# Altium PCB HATB-A0.PcbDoc
Units mm, origin at the board's own origin, x right, y up, seen from the top; angles counter-clockwise.
Board outline 83.5 x 75.5 mm, 2 copper layers (Top Layer, Bottom Layer); 66 components, 39 nets, 161 pads, 384 vias.
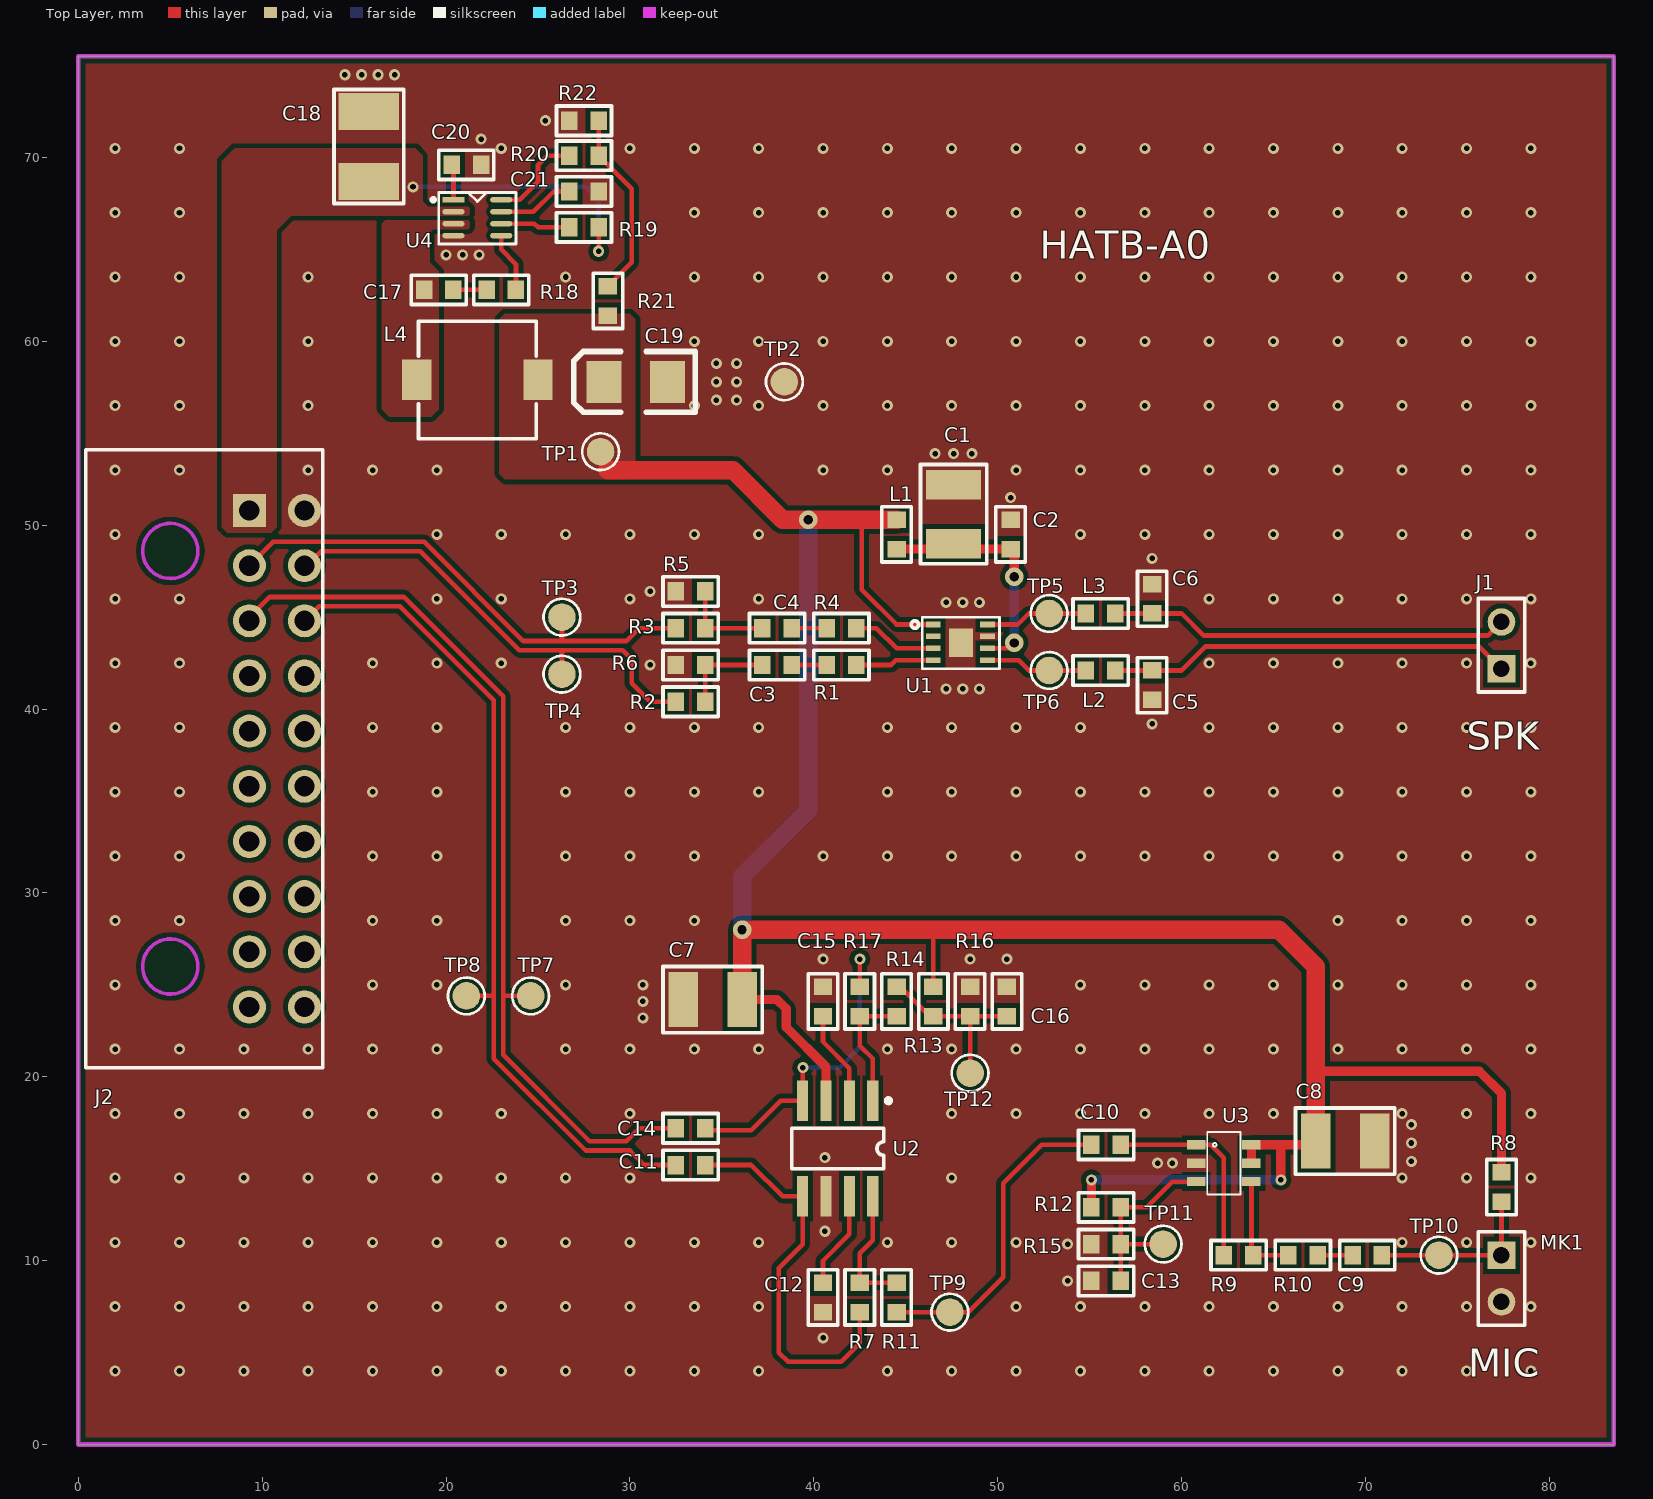
[diagram p0: Top Layer view]
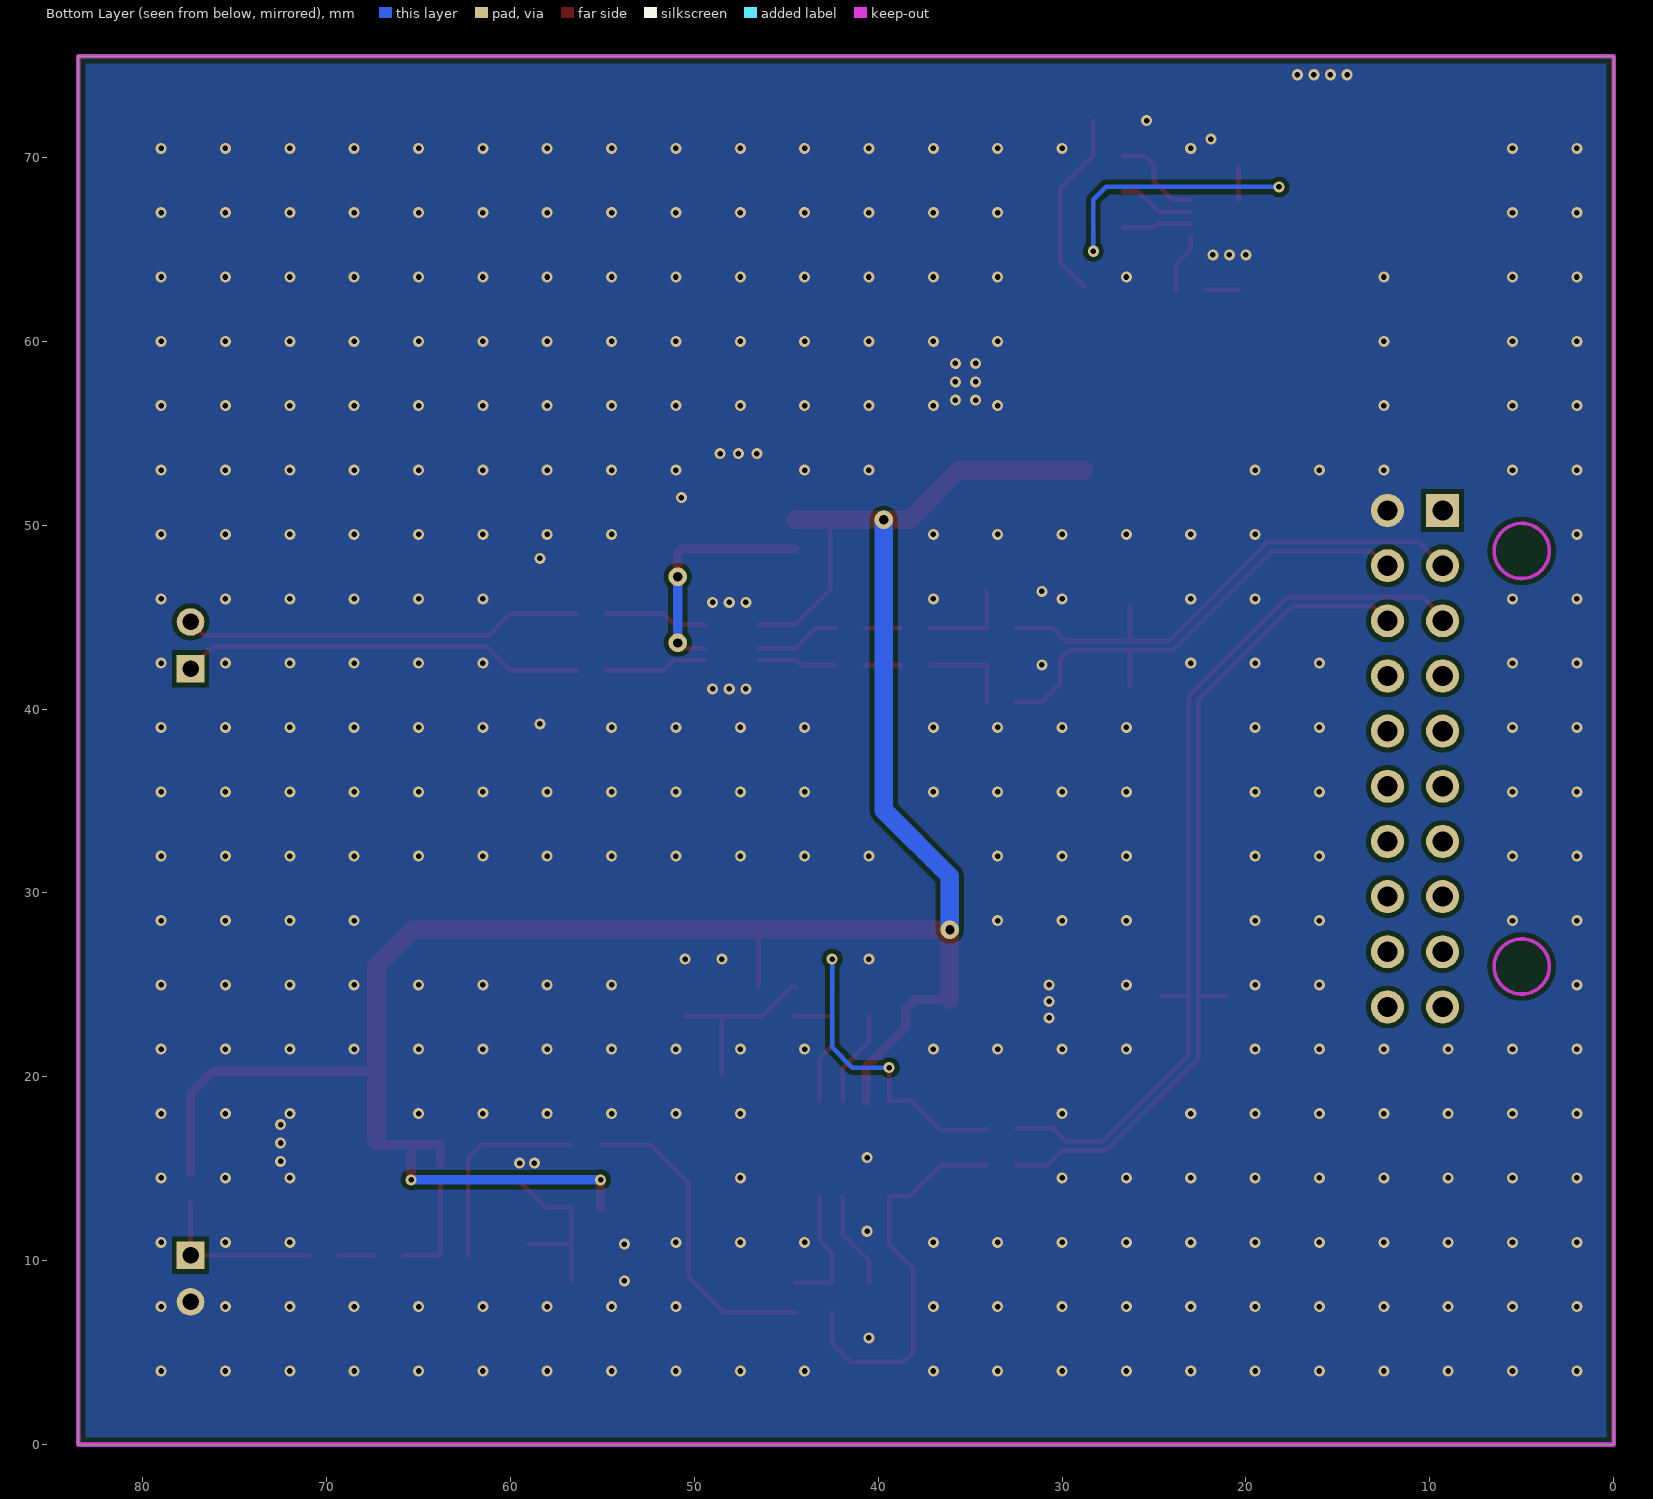
[diagram p1: Bottom Layer view, seen from below]

## Layer stack, top to bottom
Top Layer: signal copper 0.0356
Dielectric: dielectric 0.32, FR-4, Dk 4.8
Bottom Layer: signal copper 0.0356

## Board outline
0,0 83.5,0 83.5,75.5 0,75.5

## Design rules (kind name [scope] priority, off if disabled: settings)
Clearance Clearance_2 [InComponent('U4')] p1: gap=0.2
Clearance Clearance_1 [InNet('V12') vs InNet('NetC17_1')] p2: gap=0.2
Clearance [All] p3: gap=0.254
ComponentClearance [All] p1: gap=0.1 collisioncheckmode=3 verticalgap=0.1 showdistances=FALSE
PolygonConnect [All] p1: connectstyle=Direct reliefconductorwidth=0.254 reliefentries=4 polygonreliefangle="90 Angle"
RoutingVias [All] p1: holewidth=0.3 width=0.6 viastyle="Through Hole" minholewidth=0.3 minwidth=0.6 maxholewidth=0.3 maxwidth=0.6
SilkscreenOverComponentPads [All] p1: minsilkscreentomaskgap=0.254
SolderMaskExpansion [All] p1: expansion=0.102
Width [All] p1: maxlimit=4 minlimit=0.254 preferedwidth=0.254 minimp=50.000000 maximp=50.000000 favimp=50.000000
26 further rules are at their usual default settings.

## Classes and differential pairs
component class handset_adapter: C1 C2 C3 C4 C5 C6 C7 C8 C9 C10 C11 C12 C13 C14 C15 C16 C17 C18 C19 C20 C21 J1 J2 L1 L2 L3 L4 MK1 R1 R2 R3 R4 R5 R6 R7 R8 R9 R10 R11 R12 R13 R14 R15 R16 R17 R18 R19 R20 R21 R22 U1 U2 U3 U4

## Components (designator, comment, footprint, x,y, rotation, side; value= is the part's Value field where it differs from the comment)
C1 "22uF/10V" 1210 47.6,52.2 r270 top
C2 "0.1uF" 0603 50.7,49.5 r180 top
C3 "0.1uF" 0603 38,42.4 r90 top
C4 "0.1uF" 0603 38,44.4 r90 top
C5 "1000pF" 0603 58.4,41.3 r180 top
C6 "1000pF" 0603 58.4,46 r0 top
C7 "22uF/10V" 1210 32.9,24.2 r0 top
C8 "22uF/10V" 1210 70.5,16.5 r180 top
C9 "0.1uF" 0603 70.1,10.3 r270 top
C10 "0.1uF" 0603 55.9,16.3 r270 top
C11 "0.22uF" 0603 33.3,15.2 r90 top
C12 "0.1uF" 0603 40.5,8 r0 top
C13 "0.22uF" 0603 55.9,8.9 r90 top
C14 "0.22uF" 0603 33.3,17.2 r90 top
C15 "0.22uF" 0603 40.5,24.1 r180 top
C16 "0.22uF" 0603 50.5,24.1 r0 top
C17 "0.1uF" 0603 19.6,62.8 r90 top
C18 "10uF/25V" 1812 15.8,72.5 r270 top
C19 "47uF/10V(tan)" 3528 28.6,57.8 r180 top
C20 "0.022uF" 0603 21.1,69.6 r270 top
C21 "0.1uF" 0603 27.5,68.15 r270 top
J1 "SPEAKER" HDR1X2 77.4,42.2 r90 top
J2 "Header 20" COMM-3MM-2X10 12.3,50.8 r270 top
L1 "2200ohm/100MHz BEAD" 0603 44.5,49.5 r0 top
L2 "2200ohm/100MHz BEAD" 0603 55.6,42.1 r90 top
L3 "2200ohm/100MHz BEAD" 0603 55.6,45.2 r90 top
L4 "4.7uH/4A" IND-4.7UH-4A 21.7,57.9 r270 top
MK1 "MIC" HDR1X2 77.4,10.3 r270 top
R1 "150K" 0603 41.5,42.4 r90 top
R2 "510" 0603 33.3,40.4 r270 top
R3 "510" 0603 33.3,44.4 r270 top
R4 "150K" 0603 41.5,44.4 r90 top
R5 "510" 0603 33.3,46.4 r270 top
R6 "510" 0603 33.3,42.4 r270 top
R7 "5.1K" 0603 42.5,8 r0 top
R8 "15K" 0603 77.4,14 r180 top
R9 "100K" 0603 63.1,10.3 r90 top
R10 "10K" 0603 66.6,10.3 r90 top
R11 "1K" 0603 44.5,8 r180 top
R12 "20K" 0603 55.9,12.9 r90 top
R13 "10K" 0603 46.5,24.1 r0 top
R14 "1K" 0603 44.5,24.1 r0 top
R15 "20K" 0603 55.9,10.9 r270 top
R16 "10K" 0603 48.5,24.1 r0 top
R17 "5.1K" 0603 42.5,24.1 r180 top
R18 "10" 0603 23,62.8 r90 top
R19 "100K" 0603 27.5,66.2 r90 top
R20 "33K/1%" 0603 27.5,70.1 r270 top
R21 "40.2K/1%" 0603 28.8,62.2 r180 top
R22 "7.68K/1%" 0603 27.5,72 r270 top
TP1 "Comment" TP 28.4,54 r0 top
TP2 "Comment" TP 38.4,57.8 r0 top
TP3 "Comment" TP 26.3,45 r0 top
TP4 "Comment" TP 26.3,41.9 r0 top
TP5 "Comment" TP 52.8,45.2 r0 top
TP6 "Comment" TP 52.8,42.1 r0 top
TP7 "Comment" TP 24.6,24.4 r0 top
TP8 "Comment" TP 21.1,24.4 r0 top
TP9 "Comment" TP 47.4,7.2 r0 top
TP10 "Comment" TP 74,10.3 r0 top
TP11 "Comment" TP 59,10.9 r0 top
TP12 "Comment" TP 48.5,20.2 r0 top
U1 "TPA2005D1" QFN-8 46.5,44.6 r270 top
U2 "THS4521" SO8 41.3,16.1 r180 top
U3 "OPA836" SOT23-6 60.8,16.3 r270 top
U4 "MP1497DJ" TSOT23-8 20.4,67.7 r0 top

## Footprints (in the part's own frame and the unit in brackets; to place one, negate y for a bottom-side part, rotate by r counter-clockwise, add the part's x,y. Pads: shape width x height; smd on the part's side, far side on the other; paste and mask are expansions set on the pad)
0603 [mm]
  rect 1x0.9 smd: 1(0,0.8) 2(0,-0.8)
  silkscreen extent -0.8,-1.5 0.8,1.5
1210 [mm]
  rect 1.6x3 smd: 1(0,0) 2(3.2,0)
  silkscreen extent -1.1,-1.8 4.3,1.8
1812 [mm]
  rect 2x3.3 smd: 1(0,0) 2(3.8,0)
  silkscreen extent -1.2,-1.9 5,1.9
3528 [mil]
  rect 75x90 smd: 1(0,0) 2(-135,0)
  silkscreen extent -195,-65 65,65
COMM-3MM-2X10 [mm]
  rect 1.8x1.8 hole 1.1: 1(0,-3)
  round 1.8 hole 1.1: 2(0,0) 3(3,-3) 4(3,0) 5(6,-3) 6(6,0) 7(9,-3) 8(9,0) 9(12,-3) 10(12,0) 11(15,-3) 12(15,0) 13(18,-3) 14(18,0) 15(21,-3) 16(21,0) 17(24,-3) 18(24,0) 19(27,-3) 20(27,0)
  Keep-Out Layer circle w0.2: c2.2,-7.3 r1.5
  Keep-Out Layer circle w0.2: c24.8,-7.3 r1.5
  silkscreen extent -3.3,-11.9 30.3,1
HDR1X2 [mm] "Connector; Header; 2 Position"
  rect 1.5x1.5 hole 0.9: 1(0,0)
  round 1.5 hole 0.9: 2(2.54,0)
  silkscreen extent -1.27,-1.27 3.81,1.27
IND-4.7UH-4A [mm]
  rect 2.2x1.6 smd: 1(0,-3.3) 2(0,3.3)
  silkscreen extent -3.2,-3.2 3.2,3.2
QFN-8 [mm]
  rect 0.3x0.8 smd: 1(0,0) 2(0.65,0) 3(1.3,0) 4(1.95,0) 5(1.95,2.95) 6(1.3,2.95) 7(0.65,2.95) 8(0,2.95)
  rect 1.55x1.3 smd: 9(1,1.5)
  silkscreen extent -0.4,-1.2 2.4,3.6
SO8 [mm] "Small Outline; 8 Leads; Body Width 3.9 mm; Pitch 1.27 mm"
  rect 0.6x2.2 smd: 1(-1.905,-2.6) 2(-0.635,-2.6) 3(0.635,-2.6) 4(1.905,-2.6) 5(1.905,2.6) 6(0.635,2.6) 7(-0.635,2.6) 8(-1.905,2.6)
  silkscreen extent -2.88,-2.72 2.5,1.1
SOT23-6 [mm]
  rect 0.5x1 smd: 1(0,0) 2(1,0) 3(2,0) 4(2,3) 5(1,3) 6(0,3)
  silkscreen extent -0.7,0.6 2.7,2.4
TP [mm]
  round 1.5 smd paste-1.5: ""(0,0)
  silkscreen extent -1,-1 1,1
TSOT23-8 [mm]
  rect 1.2x0.3 smd: 1(0,0)
  oval 1.2x0.3 smd: 2(0,-0.65) 3(0,-1.3) 4(0,-1.95) 5(2.6,-1.95) 6(2.6,-1.3) 7(2.6,-0.65) 8(2.6,0)
  silkscreen extent -1.2,-2.4 3.4,0.4

## Part data
C1 C7 C12 C15: library part "P_CAP NP"
C2 C3 C4 C5 C6 C8 C9 C10 C11 C13 C14 C16 C17: library part Cap, "Capacitor"
C18 C20 C21: library part "CAP NP_Dup2"
C19: library part "CAP WP"
J1: library part "Header 2", "Header, 2-Pin"
J2: "Header, 20-Pin"
L1 L2 L3: library part INDUCTOR_0, "IND,FBEAD,SO 1206,30@100MHz,3 AMPS"
L4: library part 4.7UH_CDH2D09BNP-4R7MC_0.7A_20%
MK1: library part Mic2, "Microphone"
R1 R4 R7 R11 R13 R14 R16 R17: library part P_R
R2 R3 R5 R6 R8 R9 R10 R12 R15: library part Res3, "Resistor"
R18 R19 R20 R21 R22: library part CR16-1003FM
U1: library part TPA2005D1_3
U4: library part MP1482_5

## Via types
v1: diameter 0.6, hole 0.3, Top Layer to Bottom Layer, tented both sides, 380 vias
v2: diameter 1, hole 0.5, Top Layer to Bottom Layer, tented both sides, 4 vias

## Nets (pads, with @x,y where several pads share a name; then routed paths per layer and width w, separated by ;. In a path a pad name is that pad's centre, name@x,y a point inside that pad or via, vN(x,y) a via of type N, cw(c..) or ccw(c..) an arc to the next point about the centre after c; other vN are vias at no path point)
AOUT_N: J2.4 R2.2 TP4. | length 26.6
  Top Layer w0.254: J2.4 12.408,47.8 13.2,48.592 18.59,48.592 23.99,43.192 26.3,43.192 ; TP4.@26.3,41.3 26.3,43.192 ; R2.2 31.1,40.4 30.1,41.4 30.1,42.702 29.61,43.192 26.3,43.192
AOUT_P: J2.3 R3.2 TP3. | length 28.2
  Top Layer w0.254: J2.3 10.6,49.1 18.8,49.1 24.2,43.7 26.3,43.7 ; TP3.@26.3,45.6 26.3,43.7 ; R3.2 30.5,44.4 29.8,43.7 26.3,43.7
GND: C1.1 C2.2 C5.1 C6.1 C7.1 C8.1 C12.2 C13.1 C15.2 C16.1 C18.1 C19.2 C20.1 C21.1 J2.2 MK1.2 R5.2 R6.2 R15.2 R16.1 R22.2 TP2. U1.7 U1.9 U2.6 U3.2 U4.4
  other v1: 2,4 5.5,4 9,4 12.5,4 16,4 19.5,4 23,4 26.5,4 30,4 33.5,4 37,4 44,4 47.5,4 51,4 54.5,4 58,4 61.5,4 65,4 68.5,4 72,4 75.5,4 79,4 40.5,5.8 2,7.5 5.5,7.5 9,7.5 12.5,7.5 16,7.5 19.5,7.5 23,7.5 26.5,7.5 30,7.5 33.5,7.5 37,7.5 51,7.5 54.5,7.5 58,7.5 61.5,7.5 65,7.5 68.5,7.5 72,7.5 75.5,7.5 79,7.5 53.8,8.9 53.8,10.9 2,11 5.5,11 9,11 12.5,11 16,11 19.5,11 23,11 26.5,11 30,11 33.5,11 37,11 44,11 47.5,11 51,11 72,11 75.5,11 79,11 40.6,11.6 2,14.5 5.5,14.5 9,14.5 12.5,14.5 16,14.5 19.5,14.5 23,14.5 26.5,14.5 30,14.5 47.5,14.5 72,14.5 75.5,14.5 79,14.5 58.7,15.3 59.5,15.3 72.5,15.4 40.6,15.6 72.5,16.4 72.5,17.4 2,18 5.5,18 9,18 12.5,18 16,18 19.5,18 23,18 30,18 47.5,18 51,18 54.5,18 58,18 61.5,18 65,18 72,18 75.5,18 79,18 2,21.5 5.5,21.5 9,21.5 12.5,21.5 16,21.5 19.5,21.5 26.5,21.5 30,21.5 33.5,21.5 37,21.5 44,21.5 47.5,21.5 51,21.5 54.5,21.5 58,21.5 61.5,21.5 65,21.5 68.5,21.5 72,21.5 75.5,21.5 79,21.5 30.7,23.2 30.7,24.1 2,25 16,25 19.5,25 26.5,25 30.7,25 54.5,25 58,25 61.5,25 65,25 68.5,25 72,25 75.5,25 79,25 40.5,26.4 48.5,26.4 50.5,26.4 2,28.5 5.5,28.5 16,28.5 19.5,28.5 26.5,28.5 30,28.5 33.5,28.5 68.5,28.5 72,28.5 75.5,28.5 79,28.5 2,32 5.5,32 16,32 19.5,32 26.5,32 30,32 33.5,32 40.5,32 44,32 47.5,32 51,32 54.5,32 58,32 61.5,32 65,32 68.5,32 72,32 75.5,32 79,32 2,35.5 5.5,35.5 16,35.5 19.5,35.5 26.5,35.5 30,35.5 33.5,35.5 37,35.5 44,35.5 47.5,35.5 51,35.5 54.5,35.5 58,35.5 61.5,35.5 65,35.5 68.5,35.5 72,35.5 75.5,35.5 79,35.5 2,39 5.5,39 16,39 19.5,39 26.5,39 30,39 33.5,39 37,39 44,39 47.5,39 51,39 54.5,39 61.5,39 65,39 68.5,39 72,39 75.5,39 79,39 58.4,39.2 47.2,41.1 48.1,41.1 49,41.1 31.1,42.4 2,42.5 5.5,42.5 16,42.5 19.5,42.5 23,42.5 61.5,42.5 65,42.5 68.5,42.5 72,42.5 75.5,42.5 79,42.5 47.2,45.8 48.1,45.8 49,45.8 2,46 5.5,46 19.5,46 23,46 30,46 37,46 61.5,46 65,46 68.5,46 72,46 75.5,46 79,46 31.1,46.4 58.4,48.2 2,49.5 19.5,49.5 23,49.5 26.5,49.5 30,49.5 33.5,49.5 37,49.5 54.5,49.5 58,49.5 61.5,49.5 65,49.5 68.5,49.5 72,49.5 75.5,49.5 79,49.5 50.7,51.5 2,53 5.5,53 12.5,53 16,53 19.5,53 40.5,53 44,53 51,53 54.5,53 58,53 61.5,53 65,53 68.5,53 72,53 75.5,53 79,53 46.6,53.9 47.6,53.9 48.6,53.9 2,56.5 5.5,56.5 12.5,56.5 33.5,56.5 37,56.5 40.5,56.5 44,56.5 47.5,56.5 51,56.5 54.5,56.5 58,56.5 61.5,56.5 65,56.5 68.5,56.5 72,56.5 75.5,56.5 79,56.5 34.7,56.8 35.8,56.8 34.7,57.8 35.8,57.8 34.7,58.8 35.8,58.8 2,60 5.5,60 12.5,60 33.5,60 37,60 40.5,60 44,60 47.5,60 51,60 54.5,60 58,60 61.5,60 65,60 68.5,60 72,60 75.5,60 79,60 2,63.5 5.5,63.5 12.5,63.5 26.5,63.5 33.5,63.5 37,63.5 40.5,63.5 44,63.5 47.5,63.5 51,63.5 54.5,63.5 58,63.5 61.5,63.5 65,63.5 68.5,63.5 72,63.5 75.5,63.5 79,63.5 20,64.7 20.9,64.7 21.8,64.7 2,67 5.5,67 33.5,67 37,67 40.5,67 44,67 47.5,67 51,67 54.5,67 58,67 61.5,67 65,67 68.5,67 72,67 75.5,67 79,67 2,70.5 5.5,70.5 23,70.5 30,70.5 33.5,70.5 37,70.5 40.5,70.5 44,70.5 47.5,70.5 51,70.5 54.5,70.5 58,70.5 61.5,70.5 65,70.5 68.5,70.5 72,70.5 75.5,70.5 79,70.5 21.9,71 25.4,72 14.5,74.5 15.4,74.5 16.3,74.5 17.2,74.5
MIC_N: C11.1 J2.6 TP8. | length 46
  Top Layer w0.254: J2.6 13.092,45.592 17.49,45.592 22.592,40.49 22.592,24.4 ; TP8. 22.592,24.4 ; C11.1 30.792,15.2 30,15.992 27.59,15.992 22.592,20.99 22.592,24.4
MIC_P: C14.1 J2.5 TP7. | length 49.3
  Top Layer w0.254: J2.5 9.3,45 10.4,46.1 17.7,46.1 23.1,40.7 23.1,24.4 ; TP7. 23.1,24.4 ; C14.1 30.5,17.2 29.8,16.5 27.8,16.5 23.1,21.2 23.1,24.4
NetC1_2: C1.2 C2.1 L1.2 U1.6 | length 12.7
  Top Layer w0.254: U1.6 50.6,43.3 v2(50.9,43.6)
  Top Layer w0.5: L1.2 C2.1 ; v2(50.9,47.2) C2.1@50.9,48.5
  Bottom Layer w0.5: v2(50.9,43.6) v2(50.9,47.2)
NetC3_1: C3.1 R2.1 R6.1 | length 5.1
  Top Layer w0.254: R2.1 R6.1 C3.1
NetC3_2: C3.2 R1.1 | length 1.9
  Top Layer w0.254: C3.2 R1.1
NetC4_1: C4.1 R3.1 R5.1 | length 5.1
  Top Layer w0.254: R5.1 R3.1 C4.1
NetC4_2: C4.2 R4.1 | length 1.9
  Top Layer w0.254: C4.2 R4.1
NetC5_2: C5.2 J1.1 L2.2 | length 22
  Top Layer w0.254: L2.2 C5.2 60,42.1 61.3,43.4 76.2,43.4 J1.1
NetC6_2: C6.2 J1.2 L3.2 | length 21.8
  Top Layer w0.254: L3.2 C6.2 60,45.2 61.2,44 76.66,44 J1.2
NetC9_1: C9.1 MK1.1 R8.1 TP10. | length 9.4
  Top Layer w0.254: C9.1 MK1.1 R8.1
NetC9_2: C9.2 R10.2 | length 1.9
  Top Layer w0.254: R10.2 C9.2
NetC10_1: C10.1 R9.1 U3.1 | length 11.2
  Top Layer w0.254: C10.1 U3.1 61.6,16.3 62.3,15.6 R9.1
NetC10_2: C10.2 R11.1 TP9. | length 17.4
  Top Layer w0.254: R11.1 48.4,7.2 50.3,9.1 50.3,14.2 52.4,16.3 C10.2
NetC11_2: C11.2 R7.2 U2.5 | length 21.8
  Top Layer w0.254: C11.2 36.6,15.2 38.3,13.5 U2.5 39.395,10.895 38.1,9.6 38.1,5 38.6,4.5 41.5,4.5 42.5,5.5 R7.2
NetC12_1: C12.1 U2.7 | length 5.3
  Top Layer w0.254: C12.1 40.5,10 41.935,11.435 U2.7
NetC13_2: C13.2 R12.2 R15.1 TP11. U3.3 | length 11
  Top Layer w0.254: C13.2 R12.2 58.1,12.9 59.5,14.3 U3.3 ; R15.1 TP11.
NetC14_2: C14.2 R17.2 U2.4 | length 17.6
  Top Layer w0.254: C14.2 34.2,17.1 36.6,17.1 38.2,18.7 U2.4 v1@39.395,20.495 ; R17.2 v1(42.5,26.4)
  Bottom Layer w0.254: v1(39.4,20.5) 41.4,20.5 42.5,21.6 v1(42.5,26.4)
NetC15_1: C15.1 U2.2 | length 5.2
  Top Layer w0.254: C15.1 40.5,21.9 41.935,20.465 U2.2
NetC16_2: C16.2 R13.2 R14.1 R16.2 TP12. | length 9.8
  Top Layer w0.254: R14.1 44.7,24.9 46.3,23.3 R13.2 R16.2 ; TP12. R16.2 ; C16.2 R16.2
NetC17_1: C17.1 L4.1 U4.3
NetC17_2: C17.2 R18.1 | length 1.8
  Top Layer w0.254: C17.2 R18.1
NetC20_2: C20.2 U4.1 | length 1.8
  Top Layer w0.254: U4.1 C20.2@20.4,69.5
NetC21_2: C21.2 U4.7 | length 4.2
  Top Layer w0.254: U4.7 24.75,67.05 25.85,68.15 C21.2
NetL2_1: L2.1 TP6. U1.5 | length 5.6
  Top Layer w0.254: U1.5 51.15,42.65 51.7,42.1 L2.1
NetL3_1: L3.1 TP5. U1.8 | length 5.6
  Top Layer w0.254: U1.8 51.1,44.6 51.7,45.2 L3.1
NetR1_2: R1.2 U1.4 | length 4.3
  Top Layer w0.254: R1.2 44.2,42.4 44.45,42.65 U1.4
NetR4_2: R4.2 U1.3 | length 4.7
  Top Layer w0.254: R4.2 43.4,44.4 44.5,43.3 U1.3
NetR7_1: R7.1 R11.2 U2.8 | length 7
  Top Layer w0.254: U2.8 43.205,11.105 42.5,10.4 R7.1 R11.2
NetR9_2: R9.2 R10.1 U3.4 | length 5.9
  Top Layer w0.254: U3.4 63.8,10.4 R9.2 R10.1
NetR14_2: R14.2 R17.1 U2.1 | length 6.9
  Top Layer w0.254: U2.1 43.205,20.995 42.5,21.7 R17.1 R14.2
NetR18_2: R18.2 U4.5 | length 3.3
  Top Layer w0.254: U4.5 23,65 23.8,64.2 R18.2
NetR19_1: R19.1 U4.6 | length 3.8
  Top Layer w0.254: U4.6 24.8,66.4 25,66.2 R19.1
NetR20_1: R20.1 R21.2 R22.1 | length 10.3
  Top Layer w0.254: R22.1 R20.1 30.1,68.3 30.1,64.3 R21.2
NetR20_2: R20.2 U4.8 | length 5.2
  Top Layer w0.254: U4.8 24,67.7 25,68.7 25,69.6 25.5,70.1 R20.2
V5: C7.2 C8.2 C19.1 L1.1 L4.2 R8.2 R12.1 R13.1 R21.1 TP1. U1.1 U2.3 U3.5 U3.6 | length 138.9
  Top Layer w0.254: 42.6,50.3 42.6,46.5 44.5,44.6 U1.1 ; R13.1 46.5,28
  Top Layer w0.5: C7.2 38,24.2 38.5,23.7 38.5,22.7 40.665,20.535 U2.3 ; R12.1 v1(55.1,14.4) ; U3.5 U3.6 65.4,16.3 ; v1(65.4,14.4) 65.4,16.3 ; C8.2@67.1,16.3 65.4,16.3 ; 67.3,20.3 76.2,20.3 77.4,19.1 R8.2
  Top Layer w1: 28.8,53 35.6,53 38.3,50.3 v2(39.7,50.3) 42.6,50.3 L1.1 ; C7.2 v2(36.1,28) 46.5,28 65.3,28 67.3,26 67.3,20.3 C8.2
  Bottom Layer w0.5: v1(55.1,14.4) v1(65.4,14.4)
  Bottom Layer w1: v2(36.1,28) 36.1,30.9 39.7,34.5 v2(39.7,50.3)
V12: C18.2 J2.1 R19.2 U4.2 | length 14.5
  Top Layer w0.254: v1(28.3,64.9) R19.2
  Bottom Layer w0.254: v1(18.2,68.4) 27.6,68.4 28.3,67.7 v1(28.3,64.9)
pads on no net: J2.7 J2.8 J2.9 J2.10 J2.11 J2.12 J2.13 J2.14 J2.15 J2.16 J2.17 J2.18 J2.19 J2.20 U1.2

## Polygon pours and split planes (outlines as drawn)
GND on Top Layer "Keep-Out Layer-No Net" (solid, remove dead copper, pour order 19): 0,0 83.5,0 83.5,75.5 0,75.5
V5 on Top Layer "Keep-Out Layer-No Net" (solid, pour order 13): 23.7,61.5 30,61.5 30.3,61.2 30.3,52.8 30,52.5 23.5,52.5 23.2,52.5 22.9,52.8 22.9,52.9 22.9,61.2 23.2,61.5
NetC17_1 on Top Layer "Keep-Out Layer-No Net" (solid, pour order 11): 19.9,66.1 21.2,66.1 21.3,66.2 21.3,66.6 21.3,66.7 21.2,66.8 19.8,66.8 16.9,66.8 16.5,66.4 16.5,64 16.5,60.2 16.5,56.3 16.8,56 16.9,55.9 19.2,55.9 19.6,56.3 19.6,63.8 19.1,64.3 19.1,65 19.1,65.9 19.3,66.1
V12 on Top Layer "Keep-Out Layer-No Net" (solid, pour order 7): 19.91,67.33 21.201,67.33 21.3,67.231 21.3,66.934 21.201,66.835 19.315,66.835 17.726,66.835 11.572,66.835 10.778,66.043 10.778,49.897 10.48,49.6 8.197,49.6 8.098,49.6 7.8,49.897 7.8,51.383 7.8,69.807 8.495,70.5 18.322,70.5 18.719,70.104 18.719,67.627 19.017,67.33
GND on Bottom Layer "Keep-Out Layer-No Net" (solid, remove dead copper, pour order 17): 0,0 83.5,0 83.5,75.5 0,75.5

## Keep-outs
Keep-Out Layer:
  lines w0.254: 0,0 81,0 83.5,0 83.5,75.5 0,75.5 0,0

## Silkscreen, mask and mechanical layers (free items; w line width, h text height)
Top Overlay:
  text "HATB-A0" at 52.3,64.5 h1.52
  text "SPK" at 75.5,37.8 h1.52
  text "MIC" at 75.6,3.7 h1.52